# Altium PCB DC Link Non-Isolated.PcbDoc
Units mil, origin at the board's own origin, x right, y up, seen from the top; angles counter-clockwise.
Board outline 5310 x 3180 mil, 2 copper layers (Top Layer, Bottom Layer); 23 components, 3 nets, 40 pads, 0 vias.
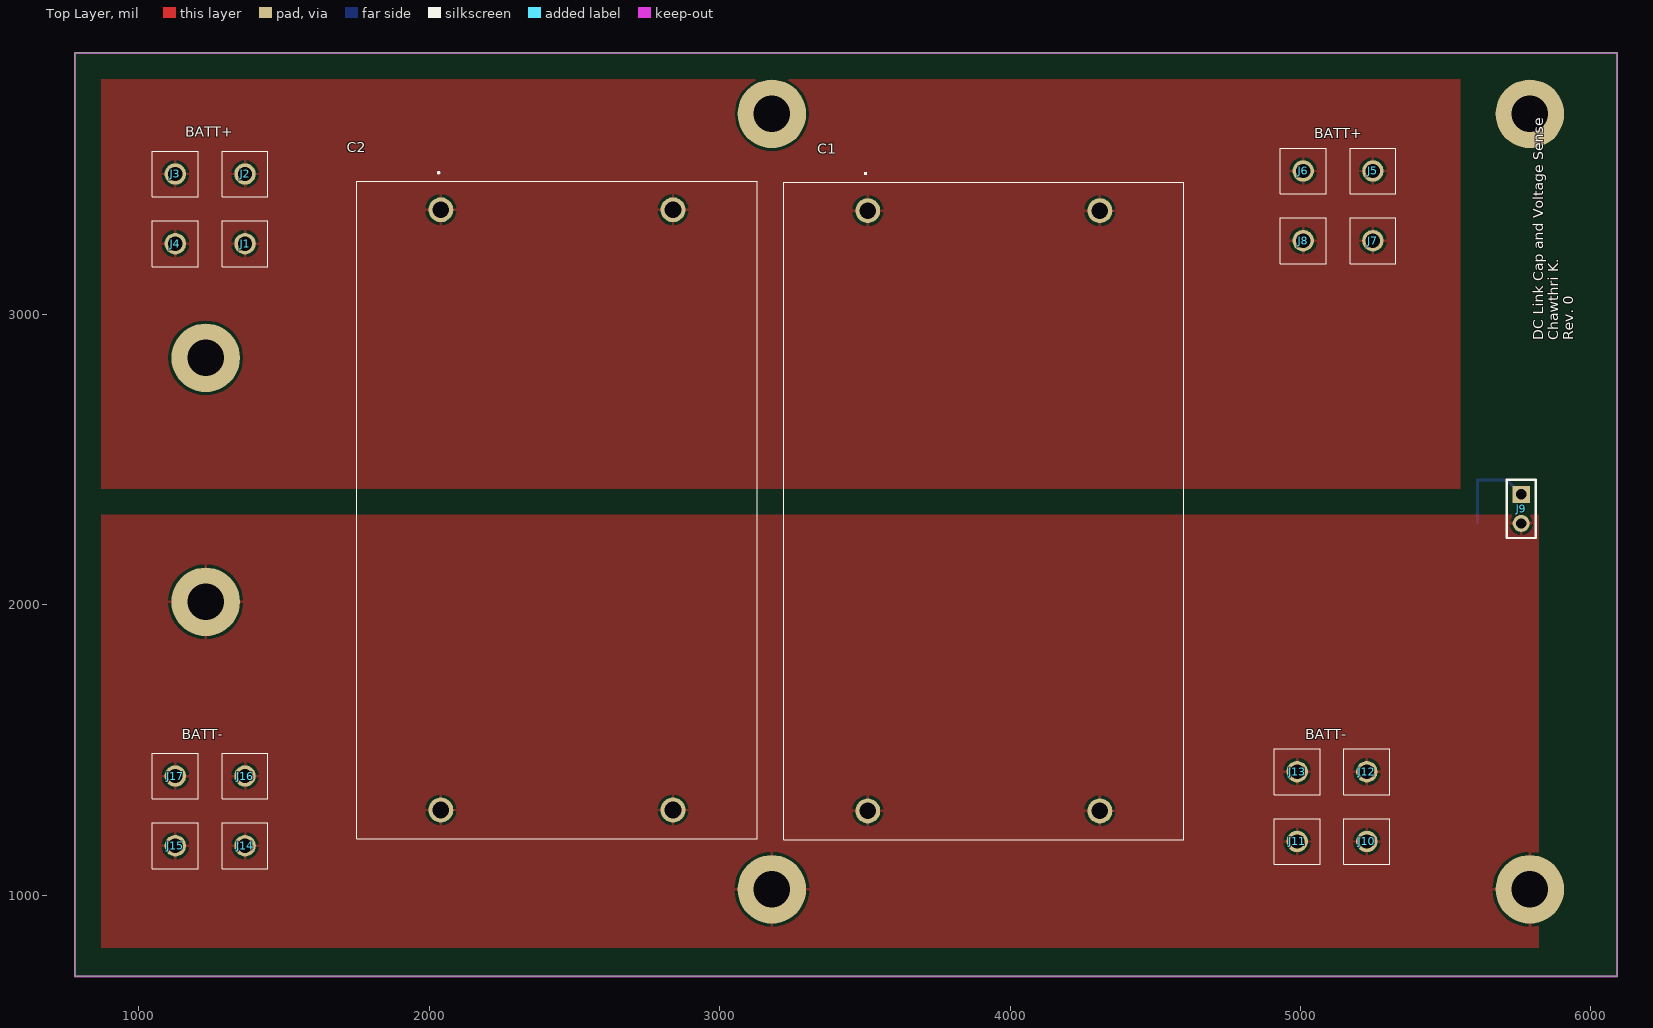
[diagram p0: Top Layer view]
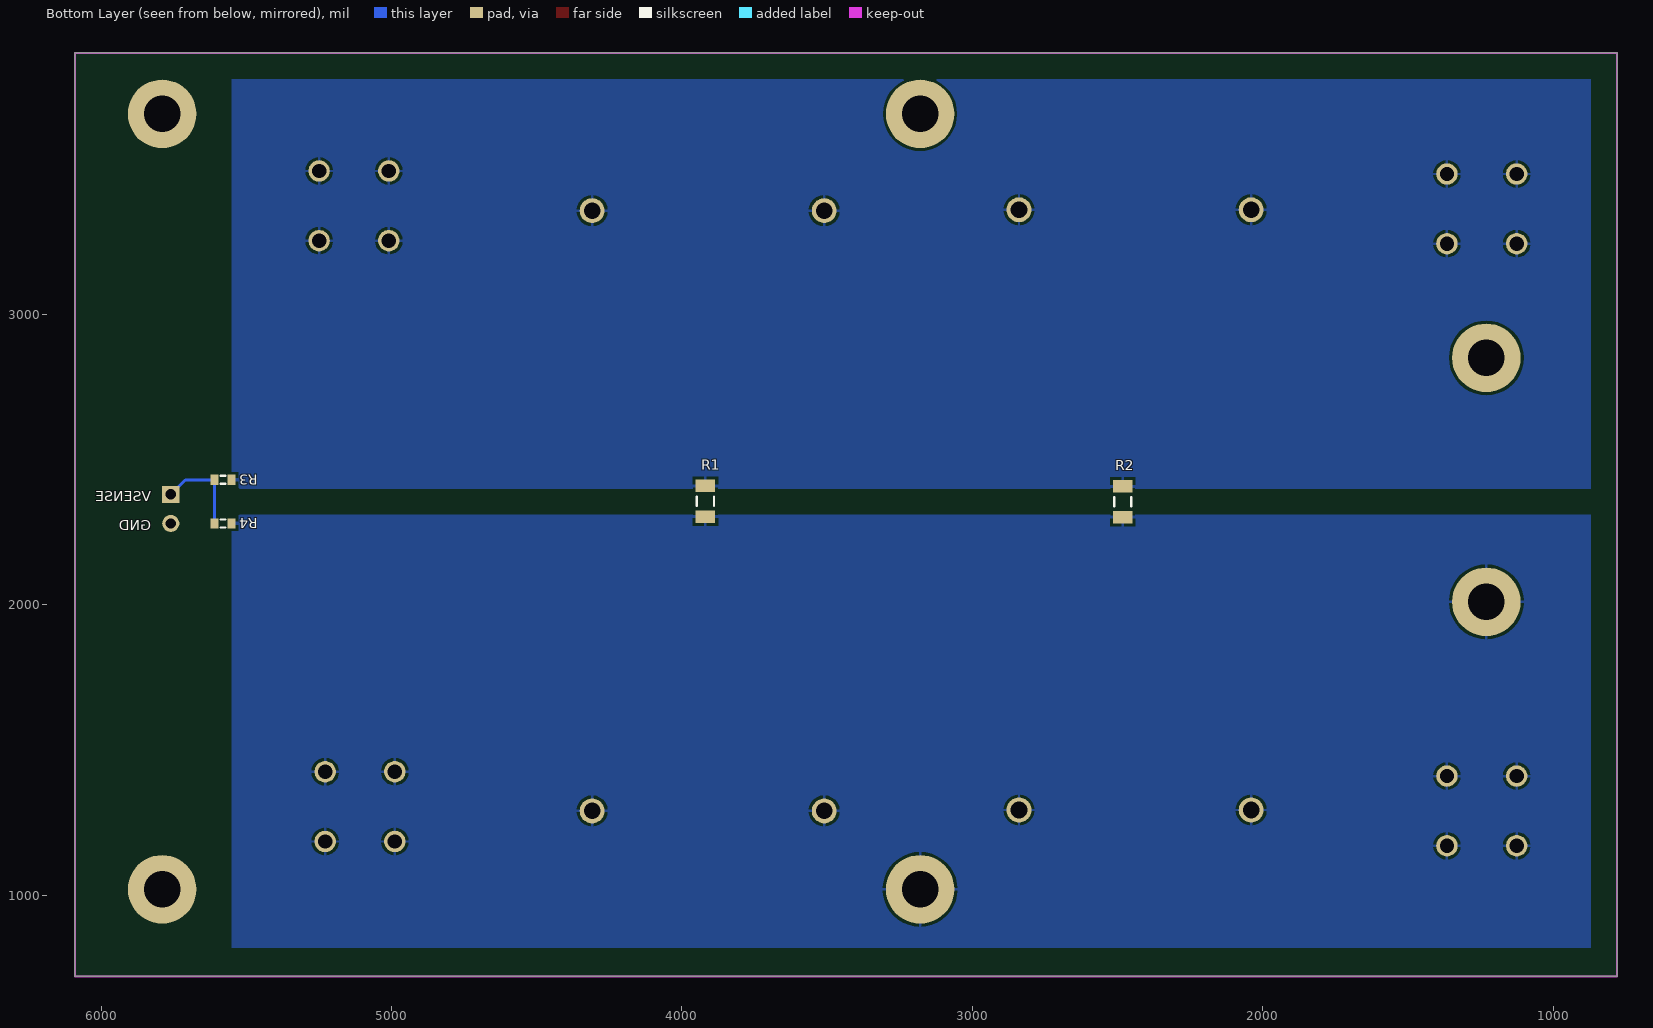
[diagram p1: Bottom Layer view, seen from below]

## Layer stack, top to bottom
Top Solder: solder mask 0.4, Solder Resist, Dk 3.5
Top Layer: signal copper 1.4
Dielectric 1: dielectric 12.6, FR-4, Dk 4.8
Bottom Layer: signal copper 1.4
Bottom Solder: solder mask 0.4, Solder Resist, Dk 3.5

## Board outline
780,720 6090,720 6090,3900 780,3900

## Design rules (kind name [scope] priority, off if disabled: settings)
Clearance [All] p1: gap=10 ignorepadtopadclearanceinfootprint=FALSE except(0: Arc-Hole Track-Hole SMDPad-Hole THPad-Hole Via-Hole Fill-Hole Poly-Hole Region-Hole Text-Hole)
Height [All] p1: minheight=0 maxheight=5000 prefheight=500
MinimumSolderMaskSliver [All] p1: minsoldermaskwidth=4
PolygonConnect [All] p1: connectstyle=Relief reliefconductorwidth=10 reliefentries=4 polygonreliefangle="90 Angle" airgapwidth=10
RoutingVias [All] p1: holewidth=236.22 width=236.22 viastyle="Through Hole" minholewidth=11.81 minwidth=23.62 maxholewidth=28 maxwidth=50
SilkToSolderMaskClearance [IsPad] p1: minsilkscreentomaskgap=3.9 clearancetoexposedcopper=TRUE
SolderMaskExpansion [All] p1: expansion=4 istentingtop=FALSE
Width [All] p1: maxlimit=10 minlimit=10 preferedwidth=10
27 further rules are at their usual default settings.

## Components (designator, comment, footprint, x,y, rotation, side; value= is the part's Value field where it differs from the comment)
C1 "C4AQLBW6130A3NK" C4AQLBW6130A3NK 3510,3356.93 r270 top
C2 "C4AQLBW6130A3NK" C4AQLBW6130A3NK 2040,3360 r270 top
J1 "8730" 8730 1365.78,3243.19 r0 top
J2 "8730" 8730 1365.78,3483.19 r0 top
J3 "8730" 8730 1125.78,3483.19 r0 top
J4 "8730" 8730 1125.78,3243.19 r0 top
J5 "8730" 8730 5249.24,3493.59 r0 top
J6 "8730" 8730 5009.24,3493.59 r0 top
J7 "8730" 8730 5249.24,3253.59 r0 top
J8 "8730" 8730 5009.24,3253.59 r0 top
J9 "Header 2" HDR1X2 5760,2380 r270 top
J10 "8730" 8730 5228.46,1184.79 r0 top
J11 "8730" 8730 4988.4,1184.88 r0 top
J12 "8730" 8730 5228.4,1424.88 r0 top
J13 "8730" 8730 4988.52,1425.12 r0 top
J14 "8730" 8730 1365.78,1170.02 r0 top
J15 "8730" 8730 1125.78,1170.02 r0 top
J16 "8730" 8730 1365.78,1410.02 r0 top
J17 "8730" 8730 1125.78,1410.02 r0 top
R1 "Res3" C1206 3919.02,2356.63 r270 bottom value=39K
R2 "Res3" C1206 2482.28,2354.97 r270 bottom value=39K
R3 "Res3" J1-0603 5580,2430 r180 bottom value=100K
R4 "Res3" J1-0603 5580,2280 r0 bottom value=4.3K

## Footprints (in the part's own frame and the unit in brackets; to place one, negate y for a bottom-side part, rotate by r counter-clockwise, add the part's x,y. Pads: shape width x height; smd on the part's side, far side on the other; paste and mask are expansions set on the pad)
8730 [mm]
  round 1.875 hole 1.25: 1(0,0)
  silkscreen extent -2,-2 2,2, body extent -2,-2 2,2, height 4.98
C4AQLBW6130A3NK [mm]
  round 2.175 hole 1.45: 1(0,0) 2(52.5,0) 3(52.5,20.3) 4(0,20.3)
  silkscreen extent -3.3,-7.35 55,27.65, body extent -2.5,-7.35 55,27.65, height 50.4
C1206 [mm] "Chip Capacitor, Body 3.2x1.6mm, IPC High Density"
  rect 1.1x1.7 smd: 1(-1.35,0) 2(1.35,0)
  silkscreen extent -0.4,-0.75 0.4,0.75, body extent -1.7,-0.9 1.7,0.9, height 1.3
HDR1X2 [mm] "Connector; Header; 2 Position"
  rect 1.5x1.5 hole 0.9: 1(0,0)
  round 1.5 hole 0.9: 2(2.54,0)
  silkscreen extent -1.27,-1.27 3.81,1.27
J1-0603 [mm] "Chip Resistor, Body 1.6x0.8mm, IPC High Density"
  rect 0.7x0.9 smd: 1(-0.75,0) 2(0.75,0)
  silkscreen extent -0.2,-0.35 0.2,0.35, body extent -0.85,-0.48 0.85,0.48, height 0.9

## Part data
C1 C2: "Capacitor", Manufacturer_Name=Kemet, Arrow Part Number=C4AQLBW6130A3NK, Arrow Price/Stock=https://www.digikey.ca/en/products/detail/kemet/C4AQLBW6130A3NK/8345973, Datasheet Link=https://api.kemet.com/component-edge/download/specsheet/C4AQLBW6130A3NK.pdf, Height=50.3mm, Manufacturer_Part_Number=C4AQLBW6130A3NK, Mouser Part Number=C4AQLBW6130A3NK, Mouser Price/Stock=https://www.digikey.ca/en/products/detail/kemet/C4AQLBW6130A3NK/8345973
J1 J2 J3 J4 J5 J6 J7 J8 J10 J11 J12 J13 J14 J15 J16 J17: "Connector", Manufacturer_Name="Keystone Electronics", Mouser Part Number=534-8730, Arrow Part Number=8730, Datasheet Link=https://www.mouser.com/datasheet/2/215/730-743759.pdf, Height=4.88mm, Manufacturer_Part_Number=8730, Mouser Price/Stock=https://www.mouser.co.uk/ProductDetail/Keystone-Electronics/8730?qs=%252B%252BPv0l39JAEHqkiHVP218w%3D%3D
J9: "Header, 2-Pin", LatestRevisionDate=17-Jul-2002, LatestRevisionNote="Re-released for DXP Platform.", Publisher="Altium Limited"
R1 R2 R3 R4: "Resistor", LatestRevisionDate=29-May-2009, LatestRevisionNote="IPC-7351 Footprint Added.", PackageDescription="Chip Resistor", PackageReference=J1-0603, Published=8-Jun-2000, Publisher="Altium Limited"

## Free pads (board coordinates)
  round 236.22 hole 125.98: 11(1230,2850) 12(1230,2010) 13(5790,3690) 14(5790,1020) 16(3180,3690) 17(3180,1020)

## Nets (pads, with @x,y where several pads share a name; then routed paths per layer and width w, separated by ;. In a path a pad name is that pad's centre, name@x,y a point inside that pad or via, vN(x,y) a via of type N, cw(c..) or ccw(c..) an arc to the next point about the centre after c; other vN are vias at no path point)
BATT+: C1.1 C1.4 C2.1 C2.4 J1.1 J2.1 J3.1 J4.1 J5.1 J6.1 J7.1 J8.1 R1.1 R2.1 R3.2
BATT-: C1.2 C1.3 C2.2 C2.3 J9.2 J10.1 J11.1 J12.1 J13.1 J14.1 J15.1 J16.1 J17.1 pad.12 pad.14 pad.17 R1.2 R2.2 R4.1
NetJ9_1: J9.1 R3.1 R4.2 | length 321.2
  Bottom Layer w10: R4.2 R3.1 5710,2430 J9.1

## Polygon pours and split planes (outlines as drawn)
BATT- on Top Layer "BATT-_L01_P001" (solid, pour order 1): 5820,2310 5820,818.72 870,818.72 870,2310 900,2310
BATT+ on Top Layer "BATT+_L01_P000" (solid, pour order 0): 5550,3810 5550,2400 870,2400 870,3810 900,3810
BATT- on Bottom Layer "BATT-_L02_P003" (solid, pour order 3): 5550,2310 5550,818.72 870,818.72 870,2310 900,2310
BATT+ on Bottom Layer "BATT+_L02_P002" (solid, pour order 2): 5550,3810 5550,2400 870,2400 870,3810 900,3810

## Keep-outs
Keep-Out Layer:
  the board outline again, w7

## Silkscreen, mask and mechanical layers (free items; w line width, h text height)
Top Overlay:
  text "BATT+" at 1159.62,3612.15 h35
  text "BATT+" at 5047,3607 h35
  text "DC Link Cap and Voltage Sense / Chawthri K. / Rev. 0" at 5940,2910 h35 r90
  text "BATT-" at 1147,1537 h35
  text "BATT-" at 5017,1537 h35
Bottom Overlay:
  text "VSENSE" at 5827.54,2357.07 h35
  text "GND" at 5827,2257 h35